# Altium PCB PCB1.PcbDoc
Units mil, origin at the board's own origin, x right, y up, seen from the top; angles counter-clockwise.
Board outline 2950 x 2650 mil, 2 copper layers (Top Layer, Bottom Layer); 17 components, 14 nets, 81 pads, 4 vias.
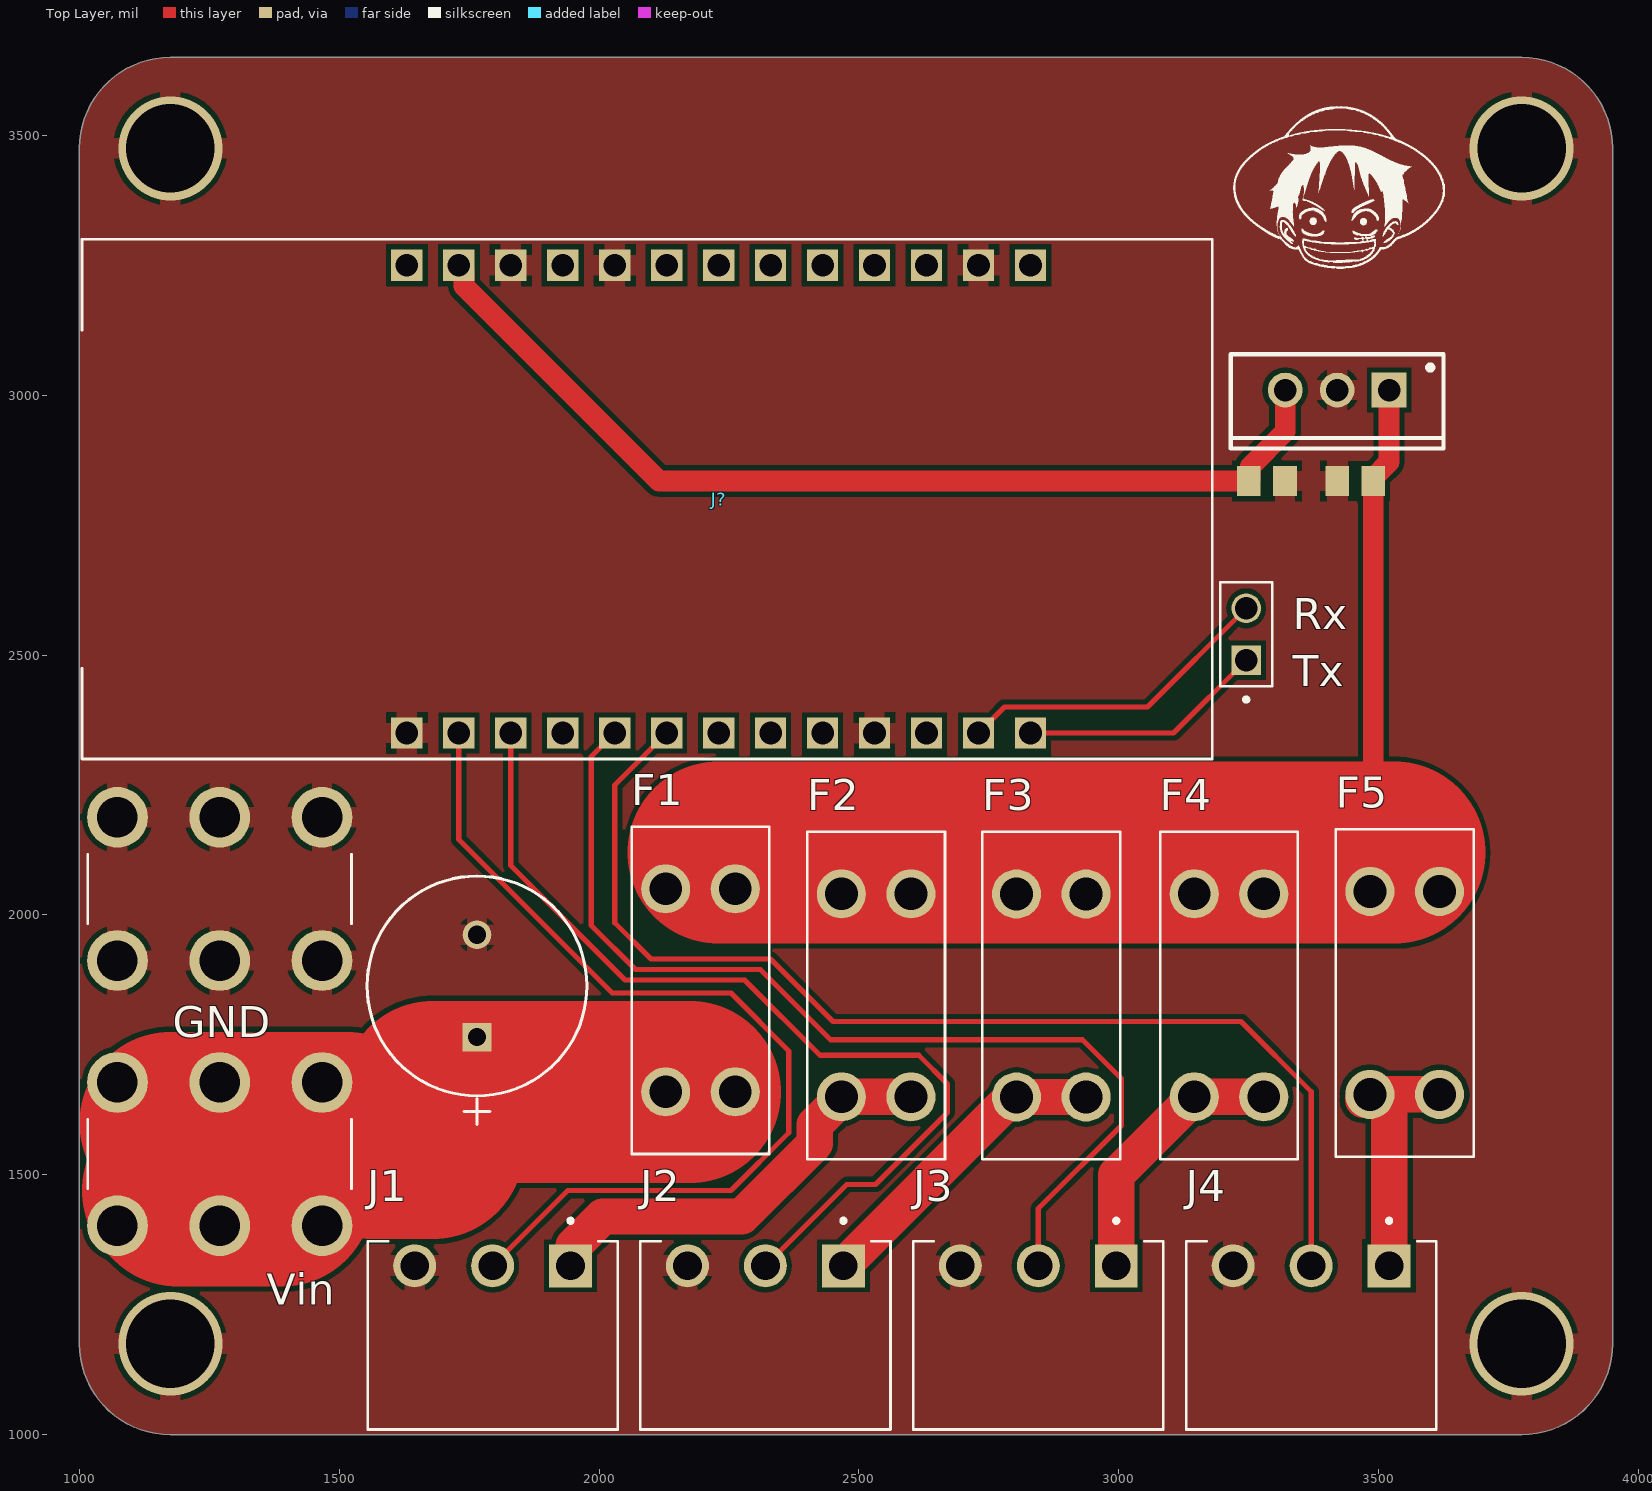
[diagram p0: Top Layer view]
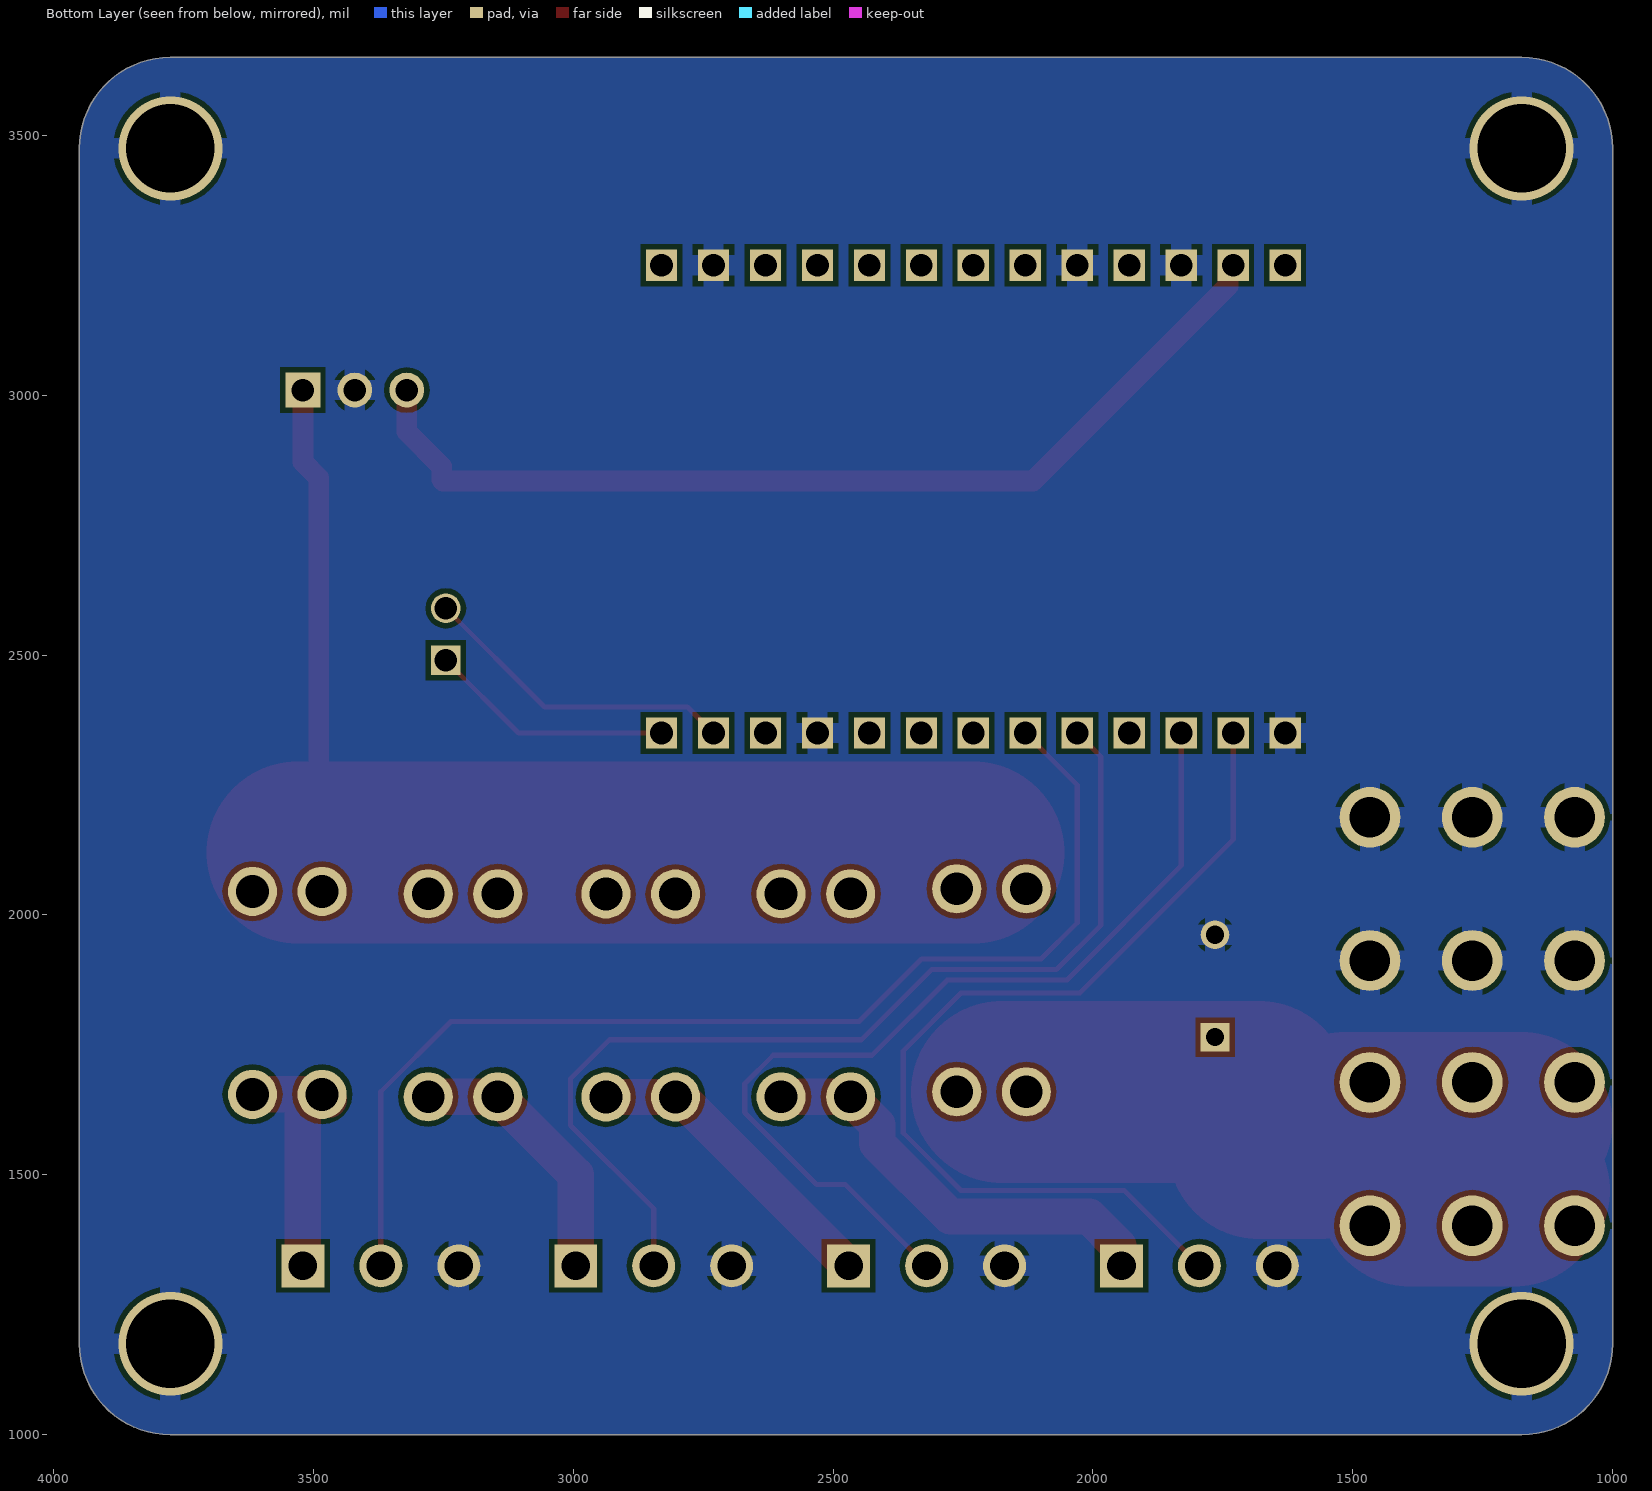
[diagram p1: Bottom Layer view, seen from below]

## Layer stack, top to bottom
Top Solder: solder mask 0.4, Solder Resist, Dk 3.5
Top Layer: signal copper 1.4
Dielectric 1: dielectric 12.6, FR-4, Dk 4.8
Bottom Layer: signal copper 1.4
Bottom Solder: solder mask 0.4, Solder Resist, Dk 3.5

## Board outline
1175,1000 cw(c1175,1175) 1000,1175 1000,3475 cw(c1175,3475) 1175,3650 3775,3650 cw(c3775,3475) 3950,3475 3950,1175 cw(c3775,1175) 3775,1000

## Design rules (kind name [scope] priority, off if disabled: settings)
Clearance [All] p1: gap=10 ignorepadtopadclearanceinfootprint=FALSE except(0: Arc-Hole Track-Hole SMDPad-Hole THPad-Hole Via-Hole Fill-Hole Poly-Hole Region-Hole Text-Hole)
ComponentClearance [All] p1: gap=10 collisioncheckmode=3 verticalgap=10 showdistances=FALSE donotcheckwithout3dbody=TRUE
PolygonConnect [All] p1: connectstyle=Relief reliefconductorwidth=40 reliefentries=4 polygonreliefangle="90 Angle" airgapwidth=10
RoutingVias [All] p1: holewidth=28 width=50 viastyle="Through Hole" minholewidth=28 minwidth=50 maxholewidth=28 maxwidth=50
SolderMaskExpansion [All] p1: expansion=4 istentingtop=FALSE
Width [All] p1: maxlimit=350 minlimit=10 preferedwidth=10 bottomlayer_maxwidth=10 minimp=50.000000 maximp=50.000000 favimp=50.000000
29 further rules are at their usual default settings.

## Classes and differential pairs
component class Sheet1: F1 F2 F3 F4 F5 GND J1 J2 Vin

## Components (designator, comment, footprint, x,y, rotation, side; value= is the part's Value field where it differs from the comment)
C1 "860010675018" CAP_WCAP-ATG8_10x12.5_WRE 1765,1765 r90 top
C2 "C2012X7R1H334K125AA" CAPC2012X145N 3455,2835 r180 top value=330nF
C3 "C2012X8R1H104K125AA" CAPC2012X145N 3285,2835 r0 top value=100nF
F1 "3568-10" FUSE_3568-10 2195,1855 r90 top
F2 "3568-10" FUSE_3568-10 2533.07,1845.28 r270 top
F3 "3568-10" FUSE_3568-10 2870,1845 r270 top
F4 "3568-10" FUSE_3568-10 3211.93,1845.28 r270 top
F5 "3568-10" FUSE_3568-10 3550,1850 r270 top
GND "7798" KEYSTONE_7798 1270,2050 r180 top (schematic designator J2)
J1 "TBP02R1-381-03BE" CUI_TBP02R1-381-03BE 1945,1325 r180 top (schematic designator J4)
J2 "TBP02R1-381-03BE" CUI_TBP02R1-381-03BE 2470,1325 r180 top (schematic designator J5)
J3 "TBP02R1-381-03BE" CUI_TBP02R1-381-03BE 2995,1325 r180 top (schematic designator J6)
J4 "TBP02R1-381-03BE" CUI_TBP02R1-381-03BE 3520,1325 r180 top (schematic designator J7)
J8 "61300211121" WURTH_61300211121 3245,2540 r90 top
J? "WT32-ETH01" WT32-ETH01 2830,3275 r270 top
U1 "L7805CV" TO220 3420,3010 r180 top
Vin "7798" KEYSTONE_7798 1270,1540 r180 top (schematic designator J1)

## Footprints (in the part's own frame and the unit in brackets; to place one, negate y for a bottom-side part, rotate by r counter-clockwise, add the part's x,y. Pads: shape width x height; smd on the part's side, far side on the other; paste and mask are expansions set on the pad)
CAP_WCAP-ATG8_10x12.5_WRE [mil]
  rect 55x55 / inner round 60 / far side rect 55x55 hole 35 paste-27.5 mask+0: 1(0,0)
  round 55 / inner round 60 / far side round 55 hole 35 paste-27.5 mask+0: 2(196.85,0)
  silkscreen extent -168,-212 310,212, body extent -108,-206 306,206, height 542
CAPC2012X145N [mm]
  rect 1.15x1.47 smd: 1(-0.88,0) 2(0.88,0)
  body extent -1,-0.63 1,0.63, height 1.45
CUI_TBP02R1-381-03BE [mm]
  rect 2.1x2.1 / inner round 2.1 / far side rect 2.1x2.1 hole 1.4: 1(0,0)
  round 2.1 hole 1.4: 2(3.81,0) 3(7.62,0)
  silkscreen extent -2.3,-2.3 9.92,8
FUSE_3568-10 [mm]
  round 2.4 hole 1.6: 1(-4.96,1.7) 2(4.96,1.7) 3(-4.96,-1.7) 4(4.96,-1.7)
  silkscreen extent -8,-3.36 8,3.36
KEYSTONE_7798 [mm]
  round 2.97 hole 1.98: 1_1(-5,-3.5) 1_2(0,-3.5) 1_3(5,-3.5) 1_4(5,3.5) 1_5(0,3.5) 1_6(-5,3.5)
  silkscreen extent -6.44,-1.7 6.44,1.7
TO220 [mm] "TO, Thru-Hole, Vertical, Heatsink Mounted; 3 In-Line Leads; Pitch 2.54 mm"
  rect 1.7x1.7 hole 1.1: 1(-2.54,0)
  round 1.7 hole 1.1: 2(0,0) 3(2.54,0)
  silkscreen extent -5.2,-1.75 5.2,2.85, body extent -5.25,-1.8 5.25,2.9, height 19.7
WT32-ETH01 [mil]
  rect 60x60 / inner round 60 / far side rect 60x60 hole 43.62: 3V3(25,-200) 3V3@1(25,-900) 5V(25,-1100) 485_EN(25,-500) CFG(25,-400) EN(25,0) EN@1(25,-300) GND(25,-100) GND@1(25,-800) GND@2(25,-1000) GND@3(925,-300) GND@4(925,-1200) IO0(925,-200) IO2(925,-1100) IO4(925,-1000) IO12(925,-800) IO14(925,-700) IO15(925,-600) IO35(925,-900) IO36(925,-500) IO39(925,-400) LINK(25,-1200) RX0(925,-100) RXD(25,-600) TX0(925,0) TXD(25,-700)
  silkscreen extent -25,-1825 975,350
WURTH_61300211121 [mm]
  rect 1.45x1.45 / inner round 1.45 / far side rect 1.45x1.45 hole 1.1: 01(-1.27,0)
  round 1.45 hole 1.1: 02(1.27,0)
  silkscreen extent -3.29,-1.27 2.54,1.27

## Part data
C1: library part CMP-001-00095-1, "No Description Available", Mfr_Name="Wurth Electronics", Copyright="Copyright (C) 2023 Ultra Librarian. All rights reserved.", Design Item ID=860010675018, Manufacturer_Part_Number=860010675018, RefDes=RefDes, Source=860010675018.SchLib, Type=DEV
C2: library part CMP-001-00103-1, "0.33 ÂµF Â±10% 50V Ceramic Capacitor X7R 0805 (2012 Metric)", Case/Package="2012 TDK", Check_prices=https://www.snapeda.com/parts/C2012X7R1H334K125AA/TDK/view-part/?ref=eda, Component Type=Standard, Design Item ID=C2012X7R1H334K125AA, Digi-Key_Part_Number=445-7541-2-ND, MF=TDK, MP=C2012X7R1H334K125AA, Pins=2, Purchase-URL=https://pricing.snapeda.com/search/part/C2012X7R1H334K125AA/?ref=eda, SnapEDA_Link=https://www.snapeda.com/parts/C2012X7R1H334K125AA/TDK/view-part/?ref=snap, Source=C2012X7R1H334K125AA.SchLib
C3: library part CMP-001-00104-1, "0.1 ÂµF Â±10% 50V Ceramic Capacitor X8R 0805 (2012 Metric)", Case/Package="2012 TDK", Availability="In Stock", Check_prices=https://www.snapeda.com/parts/C2012X8R1H104K125AA/TDK/view-part/?ref=eda, Component Type=Standard, Design Item ID=C2012X8R1H104K125AA, MF=TDK, MP=C2012X8R1H104K125AA, Pins=2, Price=None, Purchase-URL=https://pricing.snapeda.com/search/part/C2012X8R1H104K125AA/?ref=eda, SnapEDA_Link=https://www.snapeda.com/parts/C2012X8R1H104K125AA/TDK/view-part/?ref=snap, Source=C2012X8R1H104K125AA.SchLib
F1 F2 F3 F4 F5: library part CMP-005-00016-1, "THM-Vertical Entry Mini Auto Blade Fuse Holder, Red", Case/Package=None, Availability="In Stock", Check_prices=https://www.snapeda.com/parts/3568-10/Keystone/view-part/?ref=eda, Component Type=Standard, Design Item ID=3568-10, MF=Keystone, MP=3568-10, Pins=4, Price=None, Purchase-URL=https://pricing.snapeda.com/search/part/3568-10/?ref=eda, SnapEDA_Link=https://www.snapeda.com/parts/3568-10/Keystone/view-part/?ref=snap, Source=3568-10.SchLib
GND Vin: library part CMP-190-000000-1, Package=None, Availability=Unavailable, Component Type=Standard, Design Item ID=7798, MP=7798, Pin Count=6, Price=None, Source=7798.SchLib
J1 J2 J3 J4: library part CMP-192-000000-1, Package=None, Availability=Unavailable, Component Type=Standard, Design Item ID=TBP02R1-381-03BE, MF="{'manufacturer': u'CUI'}", MP=TBP02R1-381-03BE, Pin Count=3, Price=None, Source=TBP02R1-381-03BE.SchLib
J8: library part CMP-002-00083-1, "Connector Header Through Hole 2 position 0.100 (2.54mm)", Case/Package=None, Check_prices=https://www.snapeda.com/parts/61300211121/Wurth+Electronics+Inc./view-part/?ref=eda, Component Type=Standard, Design Item ID=61300211121, MF="Wurth Electronics", MP=61300211121, Pins=2, SnapEDA_Link=https://www.snapeda.com/parts/61300211121/Wurth+Electronics+Inc./view-part/?ref=snap, Source=61300211121.SchLib
J?: library part CMP-188-000000-2, Package=None, Availability="Not in stock", Check_prices=https://www.snapeda.com/parts/WT32-ETH01/Wireless-Tag/view-part/?ref=eda, Component Type=Standard, Design Item ID=WT32-ETH01, MF=wireless-tag, MP=WT32-ETH01, Pin Count=26, Price=None, SnapEDA_Link=https://www.snapeda.com/parts/WT32-ETH01/Wireless-Tag/view-part/?ref=snap, Source=WT32-ETH01.SchLib
U1: library part CMP-019-00018-3, "Positive Voltage Regulator IC, 1.5 A, 5 V, 0 to 125 degC, 3-Pin TO-220, RoHS, Tube", Case/Package=TO-220, Dropout Voltage=2V, Manufacturer=STMicroelectronics, Max Input Voltage=35V, Max Operating Temperature=125°C, Max Ouput Current=1.5A, Max Supply Voltage=20V, Min Input Voltage=7V, Min Operating Temperature=0°C, Min Supply Voltage=8V, Nominal Output Voltage=5V, Package Quantity=50, Datasheet URL=https://datasheet.ciiva.com/15111/getdatasheetpartid-44136-15111027.pdf, Datasheet Version="Rev 30, 09/2012", Manufacturer URL=http://www.st.com/, Mounting Technology=TH, Output Current=1.5A, Output Voltage=5V, Outputs=1, Packaging=Rail/Tube, Pins=3, RoHS Compliant=True

## Via types
v1: diameter 200, hole 170, Top Layer to Bottom Layer, 4 vias

## Nets (pads, with @x,y where several pads share a name; then routed paths per layer and width w, separated by ;. In a path a pad name is that pad's centre, name@x,y a point inside that pad or via, vN(x,y) a via of type N, cw(c..) or ccw(c..) an arc to the next point about the centre after c; other vN are vias at no path point)
+12: C2.1 F1.2 F1.4 F2.1 F2.3 F3.1 F3.3 F4.1 F4.3 F5.1 F5.3 U1.1 | length 2219.3
  Top Layer w10: 3489.65,2160.35 3530,2120 ; C2.1 C2.1@3489.65,2841.3
  Top Layer w40: 3489.65,2160.35 C2.1 ; C2.1@3489.65,2841.3 3520,2871.65 U1.1
  Top Layer w350: 2230,2120 2466.14,2120 2600,2120 3530,2120
GND: C1.2 C2.2 C3.2 GND.1_1 GND.1_2 GND.1_3 GND.1_4 GND.1_5 GND.1_6 J1.3 J2.3 J3.3 J4.3 J?.GND J?.GND@1 J?.GND@2 J?.GND@3 J?.GND@4 U1.2
  other v1: 1175,1175 3775,1175 1175,3475 3775,3475
NetC1_1: C1.1 F1.1 F1.3 Vin.1_1 Vin.1_2 Vin.1_3 Vin.1_4 Vin.1_5 Vin.1_6 | length 1234.3
  Top Layer w350: 1175,1600 1515,1600 1563.66,1551.34 1680,1551.34 ; 1180,1470 1190,1460 1390,1460 ; 1680,1659.72 F1.1 F1.1@2175,1659.72
NetC3_1: C3.1 J?.5V U1.3 | length 1913.7
  Top Layer w40: J?.5V 1740,3240 1740,3210 2115,2835 C3.1 3252.99,2837.64 3252.99,2862.99 3320,2930 U1.3
NetF2_2: F2.2 F2.4 J1.1 | length 831.3
  Top Layer w70: J1.1 1951.34,1331.34 1951.34,1363.99 2007.07,1419.72 2274.41,1419.72 2415,1560.31 2415,1596.75 2466.14,1647.89 F2.4 F2.2
NetF3_2: F3.2 F3.4 J2.1 | length 601.4
  Top Layer w70: J2.1 2794.72,1649.72 F3.4 F3.2
NetF4_2: F4.2 F4.4 J3.1 | length 521
  Top Layer w70: J3.1 2995,1500 F4.4 F4.2
NetF5_2: F5.2 F5.4 J4.1 | length 506
  Top Layer w10: F5.4 3500,1654.72 F5.4@3520,1634.72
  Top Layer w70: F5.4@3470.01,1644.72 3480.01,1654.72 F5.2 ; J4.1 F5.4@3520,1634.72
NetJ4_2: J1.2 J?.IO2 | length 1841.9
  Top Layer w10: J?.IO2 1730,2145 2025.28,1849.72 2253.7,1849.72 2365,1738.42 2365,1581.02 2253.7,1469.72 1939.72,1469.72 J1.2
NetJ5_2: J2.2 J?.IO4 | length 1796.2
  Top Layer w10: J?.IO4 1830,2095 2050,1875 2280,1875 2425,1730 2615,1730 2670,1675 2670,1620 2531.56,1481.56 2476.56,1481.56 J2.2
NetJ6_2: J3.2 J?.IO12 | length 1957.1
  Top Layer w10: J?.IO12 1985,2305 1985,1980 2070,1895 2310,1895 2445,1760 2930,1760 3005,1685 3005,1595 2845,1435 J3.2
NetJ7_2: J4.2 J?.IO14 | length 2216
  Top Layer w10: J?.IO14 2030,2250 2030,1985 2100,1915 2330,1915 2450,1795 3235,1795 3370,1660 J4.2
NetJ8_01: J8.01 J?.TX0 | length 473
  Top Layer w10: J?.TX0 3105,2350 J8.01
NetJ8_02: J8.02 J?.RX0 | length 614.4
  Top Layer w10: J?.RX0 2780,2400 3055,2400 J8.02
pads on no net: J?.3V3 J?.3V3@1 J?.485_EN J?.CFG J?.EN J?.EN@1 J?.IO0 J?.IO15 J?.IO35 J?.IO36 J?.IO39 J?.LINK J?.RXD J?.TXD

## Polygon pours and split planes (outlines as drawn)
GND on Top Layer "GND_L01_P000" (solid, pour order 0): 1175,1000 cw(c1175,1175) 1000,1175 1000,3475 cw(c1175,3475) 1175,3650 3775,3650 cw(c3775,3475) 3950,3475 3950,1175 cw(c3775,1175) 3775,1000
GND on Bottom Layer "GND_L02_P001" (solid, pour order 1): 1175,1000 cw(c1175,1175) 1000,1175 1000,3475 cw(c1175,3475) 1175,3650 3775,3650 cw(c3775,3475) 3950,3475 3950,1175 cw(c3775,1175) 3775,1000

## Silkscreen, mask and mechanical layers (free items; w line width, h text height)
Top Overlay:
  drawing of 11 lines, arcs and shapes, not listed
  text "Rx" at 3335,2550 h60
  text "Tx" at 3335,2440 h60
Board Shape:
  the board outline again, w10